# Altium PCB PCB1.PcbDoc
Units mm, origin at the board's own origin, x right, y up, seen from the top; angles counter-clockwise.
Board outline 100 x 100 mm, 2 copper layers (Top Layer, Bottom Layer); 30 components, 26 nets, 83 pads, 13 vias.
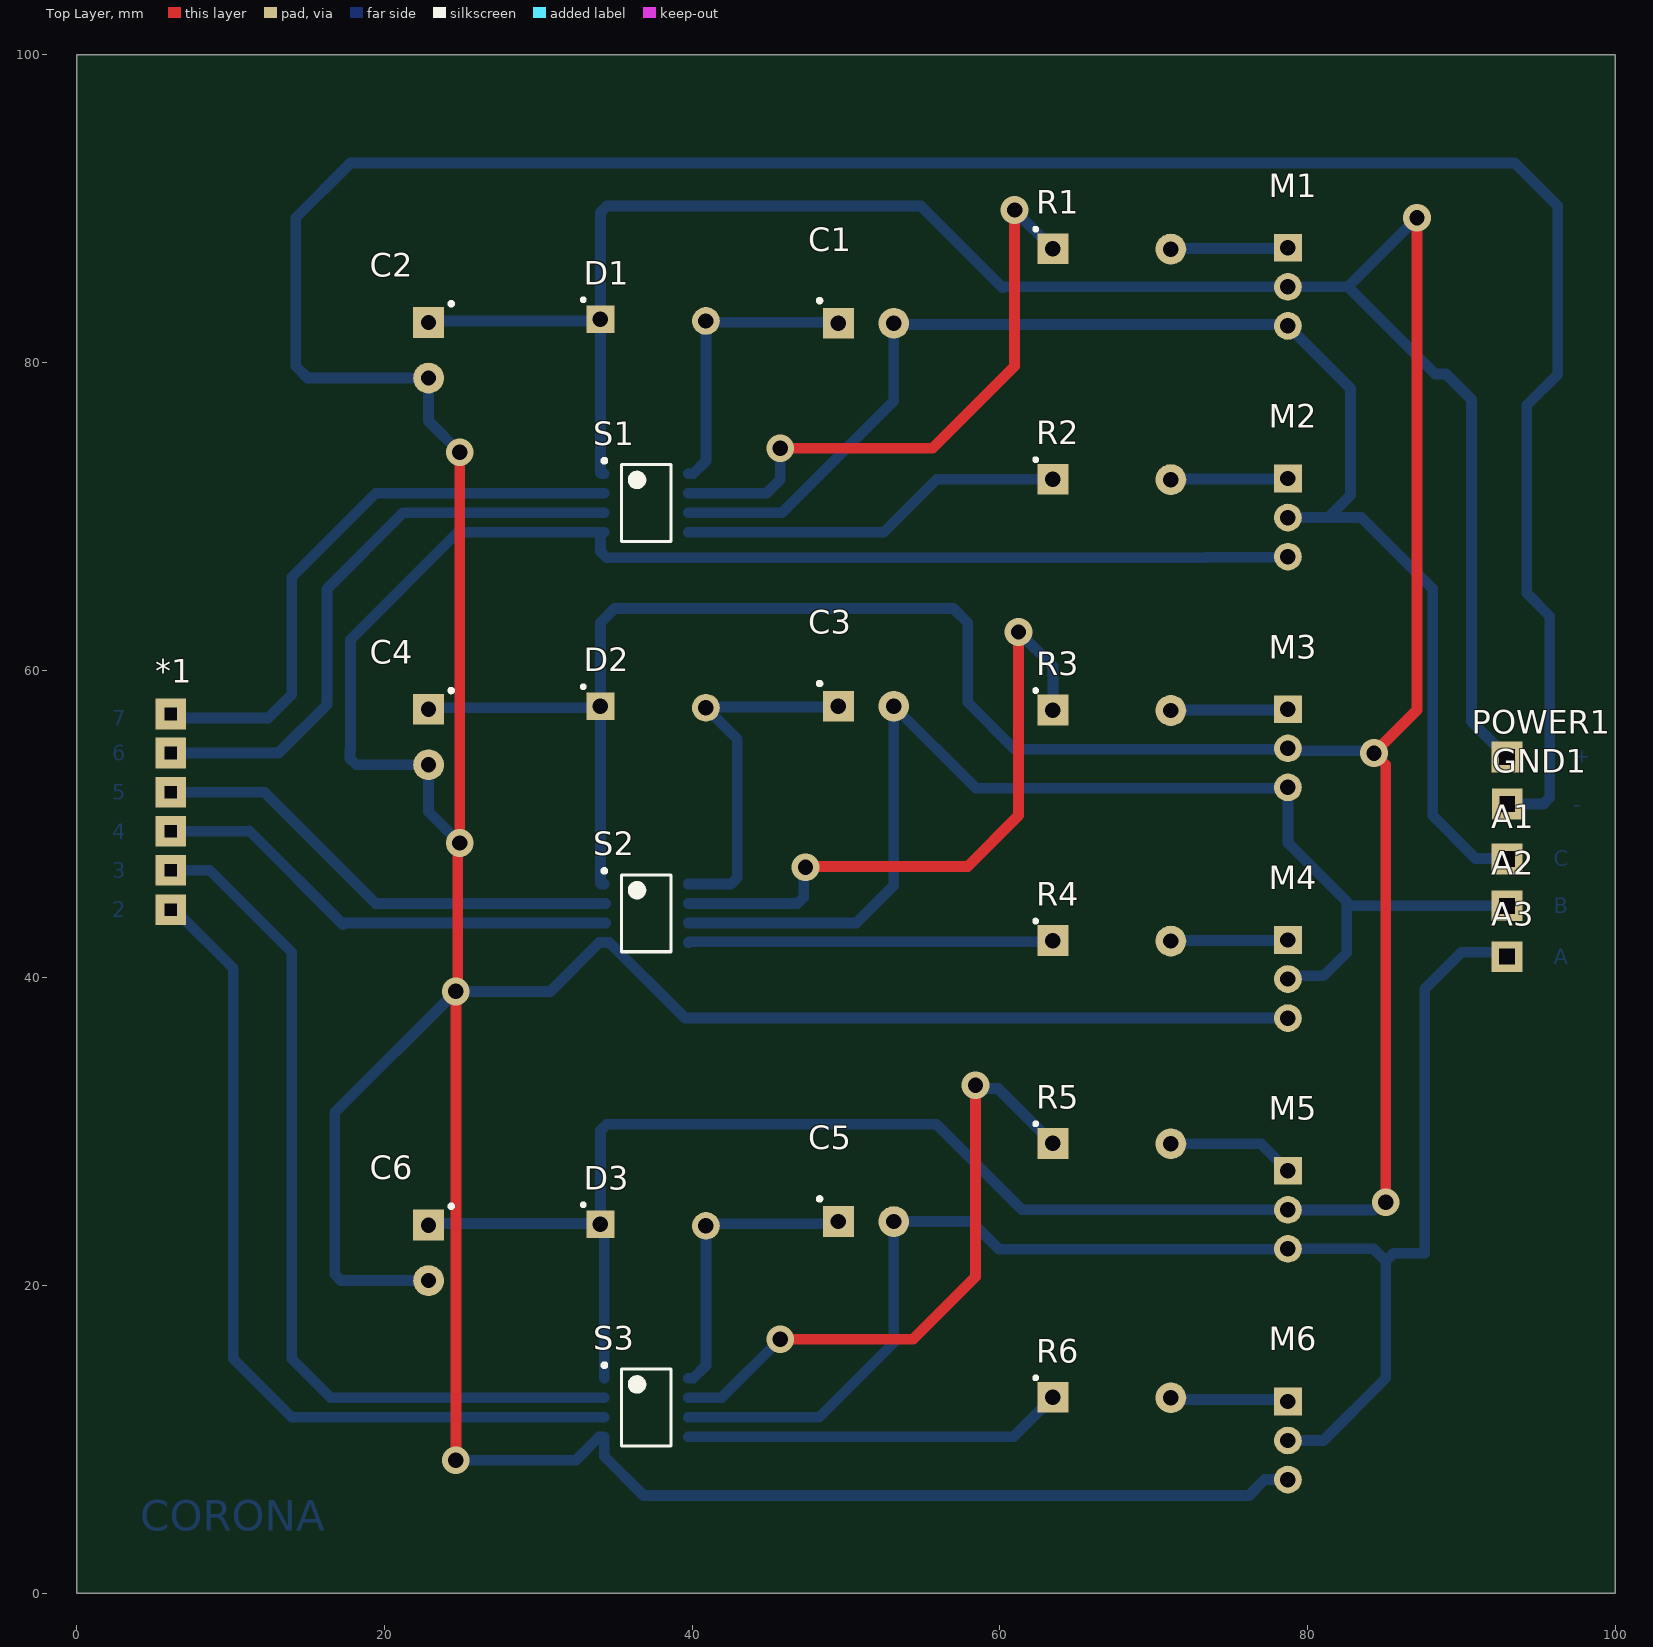
[diagram p0: Top Layer view]
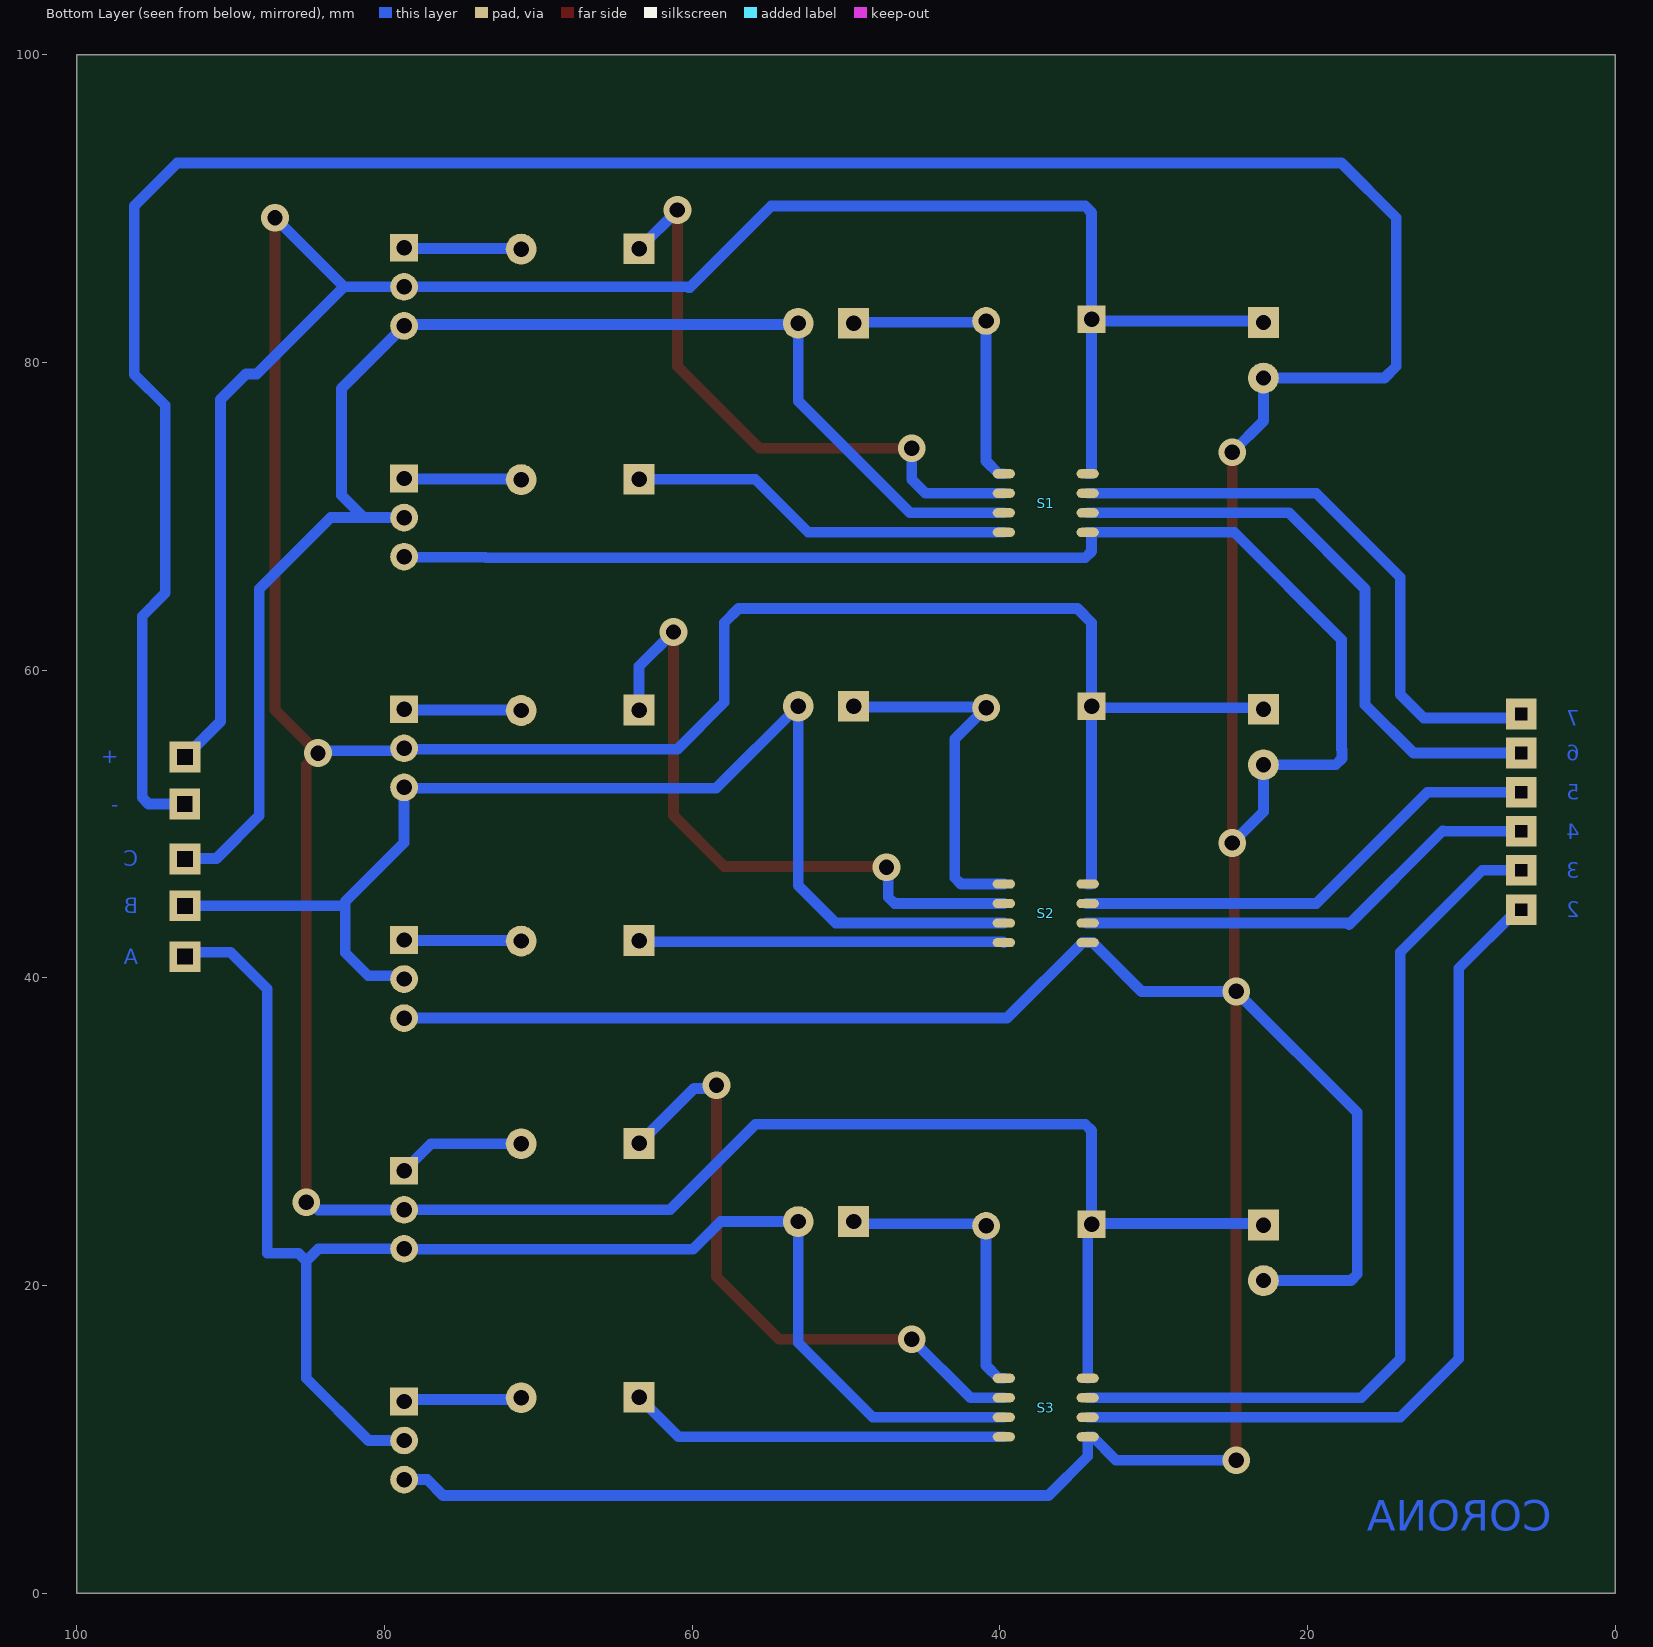
[diagram p1: Bottom Layer view, seen from below]
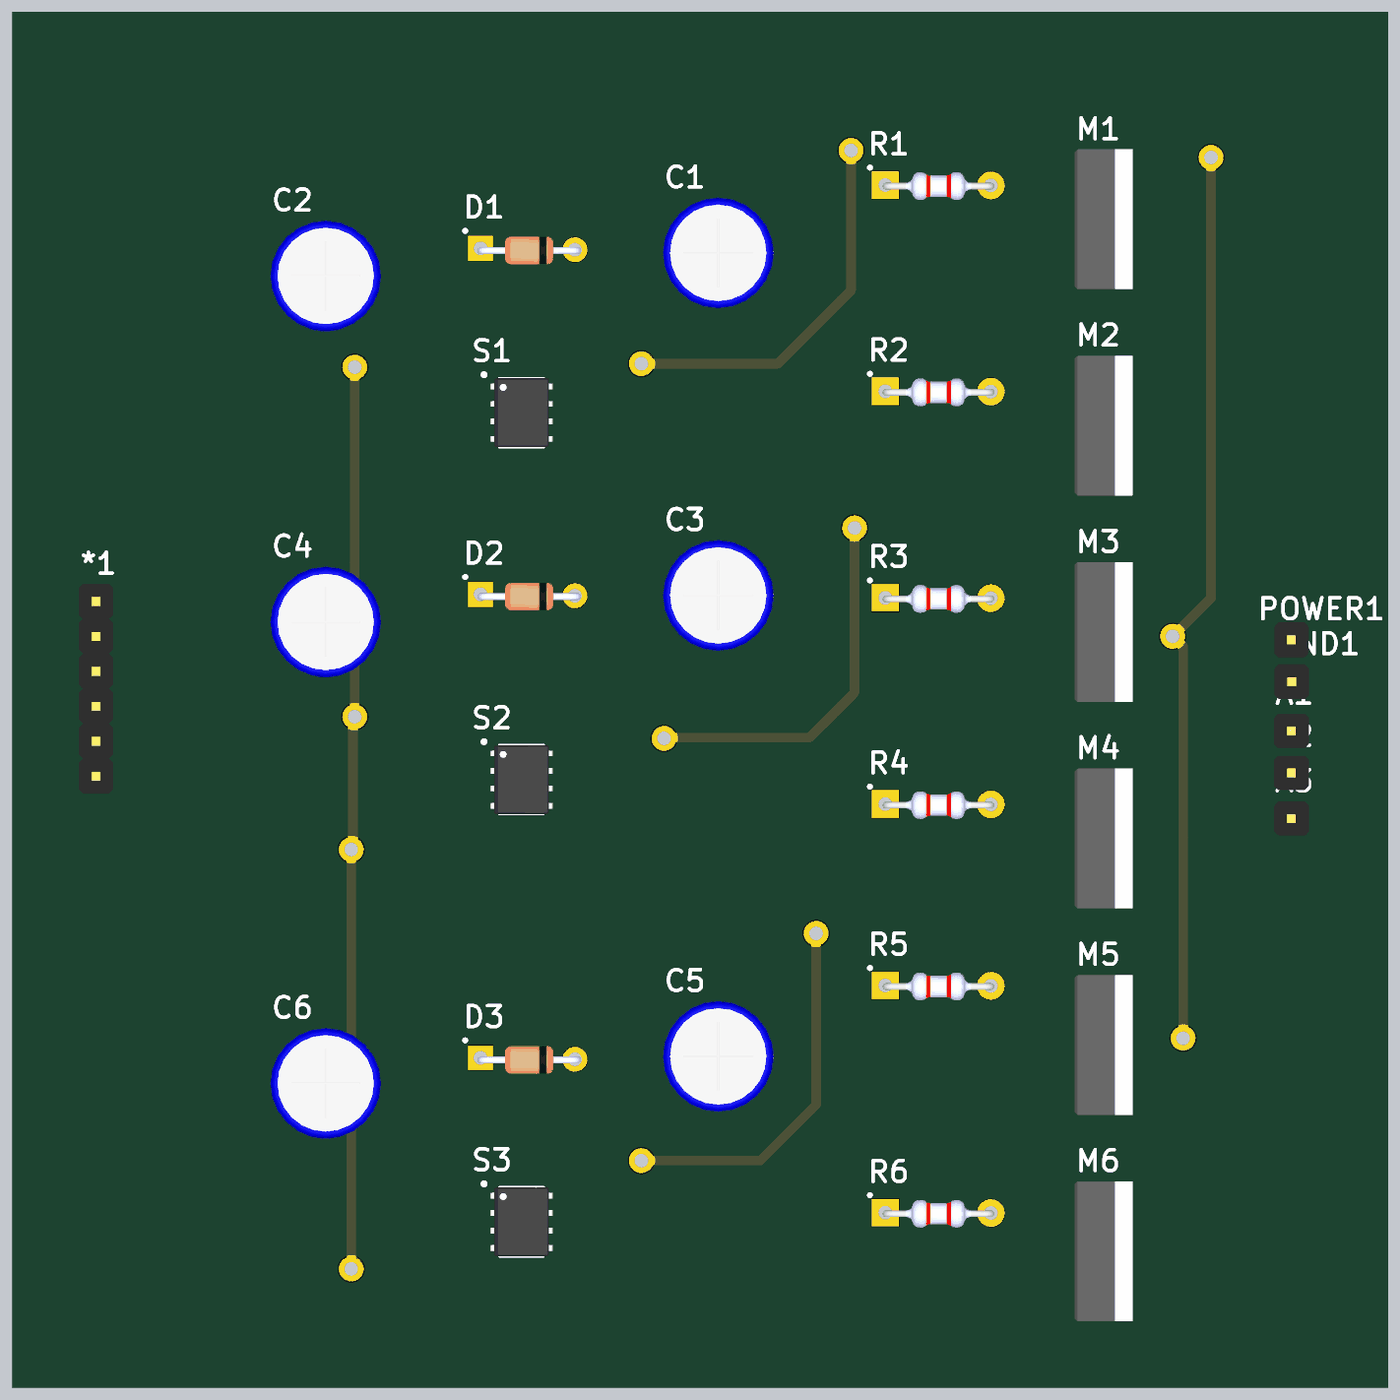
[diagram p2: 3D render of the assembled board from above, using the file's embedded part models]

## Layer stack, top to bottom
Top Solder: solder mask 0.0102, Solder Resist, Dk 3.5
Top Layer: signal copper 0.0356
Dielectric 1: dielectric 0.32, FR-4, Dk 4.8
Bottom Layer: signal copper 0.0356
Bottom Solder: solder mask 0.0102, Solder Resist, Dk 3.5

## Board outline
0,0 0,100 100,100 100,0

## Design rules (kind name [scope] priority, off if disabled: settings)
Clearance [All] p1: gap=0.254 ignorepadtopadclearanceinfootprint=FALSE except(0: Arc-Hole Track-Hole SMDPad-Hole THPad-Hole Via-Hole Fill-Hole Poly-Hole Region-Hole Text-Hole)
PolygonConnect [All] p1: connectstyle=Relief reliefconductorwidth=0.254 reliefentries=4 polygonreliefangle="90 Angle" airgapwidth=0.254
RoutingVias [All] p1: holewidth=0.711 width=1.27 viastyle="Through Hole" minholewidth=1 minwidth=1.8 maxholewidth=2 maxwidth=1.8
SolderMaskExpansion [All] p1: expansion=0.102 istentingtop=FALSE
Width [All] p1: maxlimit=2 minlimit=0.7 preferedwidth=0.254 minimp=50.000000 maximp=50.000000 favimp=50.000000
30 further rules are at their usual default settings.

## Components (designator, comment, footprint, x,y, rotation, side; value= is the part's Value field where it differs from the comment)
*1 "6pinheader" 6pinheader 6.096,44.45 r90 top
A1 "" 1pinheader 92.964,47.752 r0 top
A2 "" 1pinheader 92.964,44.704 r0 top
A3 "" 1pinheader 92.964,41.402 r0 top
C1 "2.2uF25v capacitor" "2.2uf25v capacitor" 49.53,82.525 r0 top
C2 "10uF25v capacitor" "10uf25V capacitor" 22.86,82.601 r270 top
C3 "2.2uF25v capacitor" "2.2uf25v capacitor" 49.53,57.633 r0 top
C4 "10uF25v capacitor" "10uf25V capacitor" 22.86,57.455 r270 top
C5 "2.2uF25v capacitor" "2.2uf25v capacitor" 49.53,24.13 r0 top
C6 "10uF25v capacitor" "10uf25V capacitor" 22.86,23.927 r270 top
D1 "1N4148 diyot" "1N4148 diyot" 34.036,82.804 r0 top
D2 "1N4148 diyot" "1N4148 diyot" 34.036,57.658 r0 top
D3 "1N4148 diyot" "1N4148 diyot" 34.036,23.978 r0 top
GND1 "" 1pinheader 92.964,51.308 r90 top
M1 "IRFZ46N mosfet" "IRFZ46N mosfet" 78.73,87.46 r270 top
M2 "IRFZ46N mosfet" "IRFZ46N mosfet" 78.73,72.46 r270 top
M3 "IRFZ46N mosfet" "IRFZ46N mosfet" 78.73,57.46 r270 top
M4 "IRFZ46N mosfet" "IRFZ46N mosfet" 78.73,42.46 r270 top
M5 "IRFZ46N mosfet" "IRFZ46N mosfet" 78.73,27.46 r270 top
M6 "IRFZ46N mosfet" "IRFZ46N mosfet" 78.73,12.46 r270 top
POWER1 "" 1pinheader 92.939,54.356 r90 top
R1 "100 resistor" "100 resistor" 63.424,87.401 r0 top
R2 "100 resistor" "100 resistor" 63.424,72.415 r0 top
R3 "100 resistor" "100 resistor" 63.424,57.404 r0 top
R4 "100 resistor" "100 resistor" 63.424,42.418 r0 top
R5 "100 resistor" "100 resistor" 63.424,29.235 r0 top
R6 "100 resistor" "100 resistor" 63.424,12.725 r0 top
S1 "IR2104" "IR2104 mos sürücü" 37.015,70.866 r0 top
S2 "IR2104" "IR2104 mos sürücü" 37.015,44.196 r0 top
S3 "IR2104" "IR2104 mos sürücü" 37.015,12.065 r0 top

## Footprints (in the part's own frame and the unit in brackets; to place one, negate y for a bottom-side part, rotate by r counter-clockwise, add the part's x,y. Pads: shape width x height; smd on the part's side, far side on the other; paste and mask are expansions set on the pad)
"1N4148 diyot" [mm]
  rect 1.8x1.8 hole 1 mask+0.05: 1(0,0)
  round 1.8 hole 1 mask+0.05: 2(6.858,-0.102)
  silkscreen extent -1.21,1.18 -1.03,1.36, body extent -0.22,-1.15 7.28,0.85, height 2
1pinheader [mm]
  rect 2x2 hole 1 square: 1(0,-0.025)
  body extent -1.27,-1.27 1.27,1.22, height 8.64
"2.2uf25v capacitor" [mm]
  rect 2x2 hole 1 paste+0 mask+0.05: 1(-0.025,0.025)
  round 2 hole 1 paste+0 mask+0.05: 2(3.581,0.025)
  silkscreen extent -1.36,1.39 -1.13,1.61, body extent -2.25,-4.08 5.8,3.97, height 12.53
6pinheader [mm]
  rect 2x2 hole 0.8 square: 2(-0.025,0) 3(2.54,0) 4(5.08,0) 5(7.62,0) 6(10.16,0) 7(12.7,0)
  body extent -1.27,-1.24 13.97,1.25, height 8.54
"10uf25V capacitor" [mm]
  rect 2x2 hole 1 paste+0 mask+0.05: 1(0,0)
  round 2 hole 1 paste+0 mask+0.05: 2(3.607,0)
  silkscreen extent -1.33,1.36 -1.11,1.59, body extent -2.22,-4.1 5.83,3.95, height 12.53
"100 resistor" [mm]
  rect 2x2 hole 1 mask+0.05: 1(0.025,0)
  round 2 hole 1 mask+0.05: 2(7.696,-0.025)
  silkscreen extent -1.18,1.18 -1,1.36, body extent -0.16,-1.08 7.94,0.92, height 2
"IR2104 mos sürücü" [mm] "SOIC, 8-Leads, Body 4,90x3,90mm, Pitch 1,27mm, IPC Medium Density"
  oval 1.45x0.6 smd far side: 1(-2.725,1.905) 2(-2.725,0.635) 3(-2.725,-0.635) 4(-2.725,-1.905) 5(2.725,-1.905) 6(2.725,-0.635) 7(2.725,0.635) 8(2.725,1.905)
  silkscreen extent -2.85,-2.5 1.6,2.88, body extent -3,-2.5 3,2.5, height 1.35
"IRFZ46N mosfet" [mm]
  rect 1.8x1.8 hole 1: 1(0,0)
  round 1.8 hole 1: 2(2.54,0) 3(5.08,0)
  body extent -2.54,-1.52 7.62,2.68, height 25.36

## Part data
A1 A2 A3 GND1 POWER1: library part "1 pin header"

## Via types
v1: diameter 1.8, hole 1, Top Layer to Bottom Layer, 13 vias

## Nets (pads, with @x,y where several pads share a name; then routed paths per layer and width w, separated by ;. In a path a pad name is that pad's centre, name@x,y a point inside that pad or via, vN(x,y) a via of type N, cw(c..) or ccw(c..) an arc to the next point about the centre after c; other vN are vias at no path point)
+12: C2.1 C4.1 C6.1 D1.1 D2.1 D3.1 M1.2 M3.2 M5.2 POWER1.1 S1.1 S2.1 S3.1 | length 354.2
  Top Layer w0.7: v1(85.09,25.4) 85.09,53.848 v1(84.328,54.61) 87.122,57.404 v1(87.122,89.408)
  Bottom Layer w0.7: C4.1@22.606,57.455 22.708,57.556 33.68,57.556 D2.1@33.782,57.658 ; C6.1 22.962,24.028 D3.1@34.036,24.028 ; C2.1 22.962,82.702 33.934,82.702 D1.1 ; D3.1 D3.1@34.036,24.028 ; S3.1 34.29,24.13 34.188,24.028 D3.1@34.036,24.028 ; S2.1 34.086,46.101 34.036,46.151 D2.1 34.036,63.09 34.954,64.008 56.994,64.008 57.912,63.09 57.912,57.912 60.96,54.864 78.674,54.864 M3.2 78.885,54.765 84.173,54.765 v1(84.328,54.61) ; S1.1 34.086,72.771 34.036,72.821 D1.1 ; v1(85.09,25.4) 84.808,25.4 84.314,24.906 78.744,24.906 M5.2 61.44,24.92 55.88,30.48 34.446,30.48 34.036,30.07 D3.1@34.036,24.028 ; v1(87.122,89.408) 82.634,84.92 ; POWER1.1 90.656,56.664 90.656,77.59 88.998,79.248 88.306,79.248 82.634,84.92 ; D1.1 34.036,89.76 34.446,90.17 54.864,90.17 60.162,84.872 60.234,84.872 60.282,84.92 M1.2 82.634,84.92
GND: C2.2 C4.2 C6.2 GND1.1 M2.3 M4.3 M6.3 S1.4 S2.4 S3.4 | length 444.7
  Top Layer w0.7: v1(24.638,8.636) v1(24.638,39.116) 24.765,39.243 24.765,48.641 v1(24.892,48.768) v1(24.892,74.168)
  Bottom Layer w0.7: C6.2 17.174,20.32 16.764,20.73 16.764,31.242 v1(24.638,39.116) 30.79,39.116 33.965,42.291 S2.4 34.615,42.291 39.526,37.38 M4.3 ; v1(24.638,8.636) 32.441,8.636 33.965,10.16 S3.4 34.29,8.89 36.83,6.35 76.2,6.35 77.23,7.38 M6.3 ; v1(24.892,48.768) 22.86,50.8 C4.2 18.164,53.848 17.754,54.258 17.754,54.838 17.78,54.864 17.78,61.976 24.765,68.961 S1.4@34.086,68.961 ; v1(24.892,74.168) 22.86,76.2 C2.2 14.986,78.994 14.224,79.756 14.224,89.408 17.78,92.964 93.472,92.964 96.266,90.17 96.266,79.223 94.259,77.216 94.259,65.011 95.758,63.513 95.758,51.718 95.348,51.308 GND1.1 ; S1.4 S1.4@34.086,68.961 ; M2.3 78.695,67.345 73.441,67.345 73.406,67.31 34.446,67.31 34.036,67.72 34.036,68.911 S1.4@34.086,68.961
Net*1_2: *1.2 S3.3 | length 56.5
  Bottom Layer w0.7: *1.2@6.35,44.425 10.16,40.615 10.16,15.24 13.97,11.43 S3.3
Net*1_3: *1.3 S3.2 | length 57.6
  Bottom Layer w0.7: *1.3@6.35,46.99 8.636,46.99 13.97,41.656 13.97,15.24 16.51,12.7 S3.2
Net*1_4: *1.4 S2.3 | length 30.8
  Bottom Layer w0.7: *1.4 11.176,49.53 ; 11.212,49.566 17.308,43.47 17.399,43.561 S2.3@34.359,43.561
Net*1_5: *1.5 S2.2 | length 31.3
  Bottom Layer w0.7: *1.5 12.192,52.07 19.431,44.831 S2.2@34.359,44.831
Net*1_6: *1.6 S1.3 | length 39.1
  Bottom Layer w0.7: *1.6 13.107,54.61 16.256,57.759 16.256,65.278 21.209,70.231 S1.3
Net*1_7: *1.7 S1.2 | length 38.8
  Bottom Layer w0.7: *1.7 6.35,56.896 12.446,56.896 13.97,58.42 13.97,66.04 19.431,71.501 S1.2
NetA1_1: A1.1 C1.2 M1.3 M2.2 S1.6 | length 93.9
  Bottom Layer w0.7: S1.6 45.847,70.231 53.111,77.495 C1.2 53.196,82.465 78.645,82.465 M1.3 82.804,78.306 82.804,71.374 81.35,69.92 ; M2.2 81.35,69.92 ; A1.1 92.939,47.752 90.932,47.752 88.138,50.546 88.138,65.278 83.496,69.92 81.35,69.92
NetA2_1: A2.1 C3.2 M3.3 M4.2 S2.6 | length 81.2
  Bottom Layer w0.7: S2.6 50.673,43.561 53.111,45.999 C3.2 58.445,52.324 78.674,52.324 M3.3 78.73,48.778 82.55,44.958 82.55,44.679 ; M4.2 79.028,39.92 79.24,40.132 81.051,40.132 82.55,41.631 82.55,44.679 ; A2.1 82.55,44.679
NetA3_1: A3.1 C5.2 M5.3 M6.2 S3.6 | length 98.2
  Bottom Layer w0.7: S3.6 48.26,11.43 53.111,16.281 C5.2 58.141,24.155 59.944,22.352 78.712,22.352 78.74,22.38 84.3,22.38 85.09,21.59 ; M6.2@78.74,9.92 81.04,9.92 85.09,13.97 85.09,21.59 ; A3.1@92.964,41.631 92.481,41.631 92.456,41.656 90.014,41.656 87.63,39.272 87.63,22.098 85.598,22.098 85.09,21.59
NetC1_1: C1.1 D1.2 S1.8 | length 19.3
  Bottom Layer w0.7: S1.8 40.065,72.771 40.894,73.6 D1.2 40.97,82.626 49.428,82.626 C1.1
NetC3_1: C3.1 D2.2 S2.8 | length 23.6
  Bottom Layer w0.7: S2.8 42.516,46.101 42.926,46.511 42.926,55.524 D2.2 ; D2.2@40.691,57.607 48.971,57.607 C3.1@49.022,57.658
NetC5_1: C5.1 D3.2 S3.8 | length 19.4
  Bottom Layer w0.7: S3.8 40.065,13.97 40.894,14.799 D3.2 41.034,24.016 49.365,24.016 C5.1 ; D3.2@41.148,24.028 D3.2@41.212,24.092
NetM1_1: M1.1 R1.2 | length 7.6
  Bottom Layer w0.7: R1.2 71.162,87.418 78.688,87.418 M1.1
NetM2_1: M2.1 R2.2 | length 7.6
  Bottom Layer w0.7: R2.2 71.155,72.425 78.695,72.425 M2.1
NetM3_1: M3.1 R3.2 | length 7.6
  Bottom Layer w0.7: R3.2 71.161,57.419 78.689,57.419 M3.1
NetM4_1: M4.1 R4.2 | length 7.6
  Bottom Layer w0.7: R4.2 71.154,42.426 78.696,42.426 M4.1
NetM5_1: M5.1 R5.2 | length 8.3
  Bottom Layer w0.7: R5.2 76.98,29.21 M5.1
NetM6_1: M6.1 R6.2 | length 7.7
  Bottom Layer w0.7: R6.2 71.24,12.58 78.62,12.58 M6.1@78.74,12.46
NetR1_1: R1.1 S1.7 | length 39.5
  Top Layer w0.7: v1(45.72,74.422) 55.626,74.422 60.96,79.756 v1(60.96,89.916)
  Bottom Layer w0.7: S1.7 44.831,71.501 45.72,72.39 v1(45.72,74.422) ; v1(60.96,89.916) 60.96,89.891 R1.1
NetR2_1: R2.1 S1.5 | length 25.1
  Bottom Layer w0.7: S1.5 52.451,68.961 55.905,72.415 R2.1
NetR3_1: R3.1 S2.7 | length 42.9
  Top Layer w0.7: v1(47.37,47.193) 47.421,47.244 57.912,47.244 61.214,50.546 v1(61.214,62.484)
  Bottom Layer w0.7: S2.7 46.834,44.831 47.246,45.243 47.246,47.069 v1(47.37,47.193) ; v1(61.214,62.484) 63.449,60.249 R3.1
NetR4_1: R4.1 S2.5 | length 23.8
  Bottom Layer w0.7: S2.5 39.79,42.341 63.372,42.341 R4.1
NetR5_1: R5.1 S3.7 | length 41
  Top Layer w0.7: v1(45.72,16.51) 54.356,16.51 58.42,20.574 v1(58.42,33.02)
  Bottom Layer w0.7: S3.7 41.91,12.7 v1(45.72,16.51) ; v1(58.42,33.02) 58.63,32.81 59.875,32.81 R5.1
NetR6_1: R6.1 S3.5 | length 24.8
  Bottom Layer w0.7: S3.5 60.884,10.16 R6.1

## Other copper
Bottom Layer:
  text "7" at 2.286,56.388 h1
  text "6" at 2.286,54.102 h1
  text "+" at 97.282,53.935 h1
  text "5" at 2.286,51.562 h1
  text "-" at 97.282,50.808 h1
  text "4" at 2.286,49.022 h1
  text "C" at 96.012,47.244 h1
  text "3" at 2.286,46.482 h1
  text "B" at 96.012,44.196 h1
  text "2" at 2.286,43.942 h1
  text "A" at 96.012,40.894 h1
  text "CORONA" at 4.118,4.051 h2

## Silkscreen, mask and mechanical layers (free items; w line width, h text height)
Mechanical 1:
  lines w0.254: 0.254,0 99.695,0 99.695,99.949 0.254,99.949 0.254,0